# Altium PCB WUT-YJ-4-3-1.PcbDoc (part 4 of 11)
Units mm, origin at the board's own origin, x right, y up, seen from the top; angles counter-clockwise.
Board outline 85 x 56 mm, 4 copper layers (Top Layer, GND_Plane, 3V3_Plane, Bottom Layer); 182 components, 321 nets, 1106 pads, 360 vias.
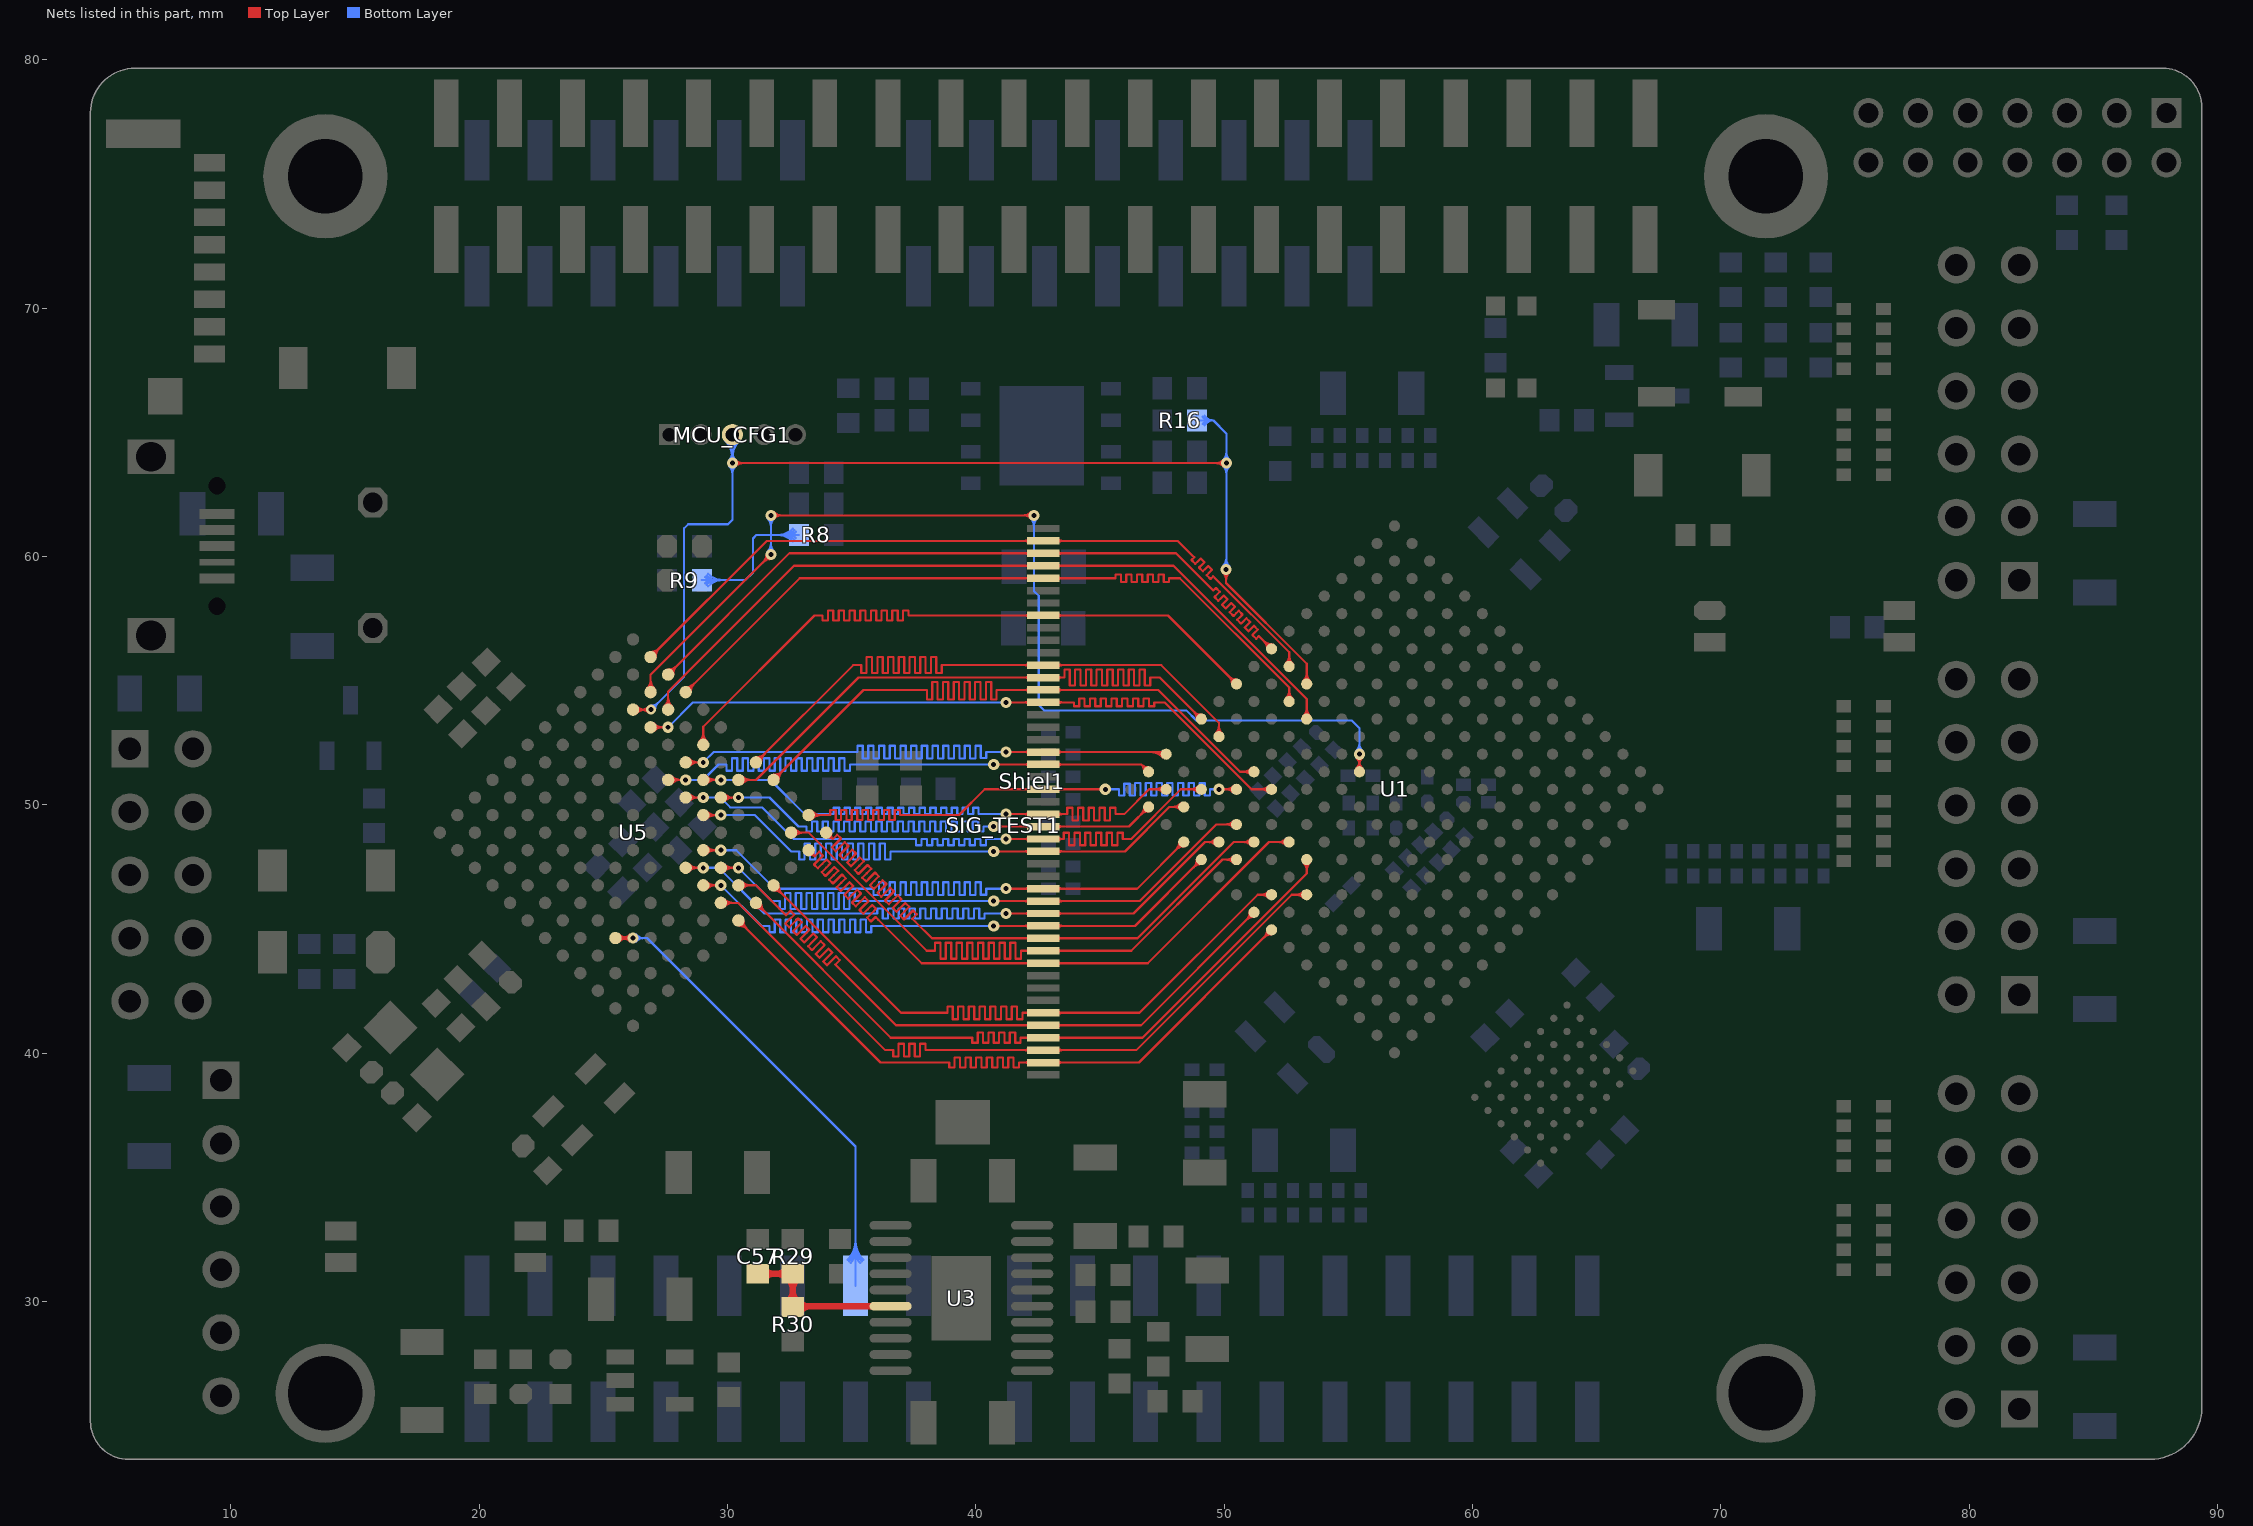
[diagram p6: the nets of this part, all layers, seen from the top]

## Via types
v1: diameter 0.45, hole 0.2, Top Layer to Bottom Layer, tented both sides, 280 vias
v2: diameter 0.61, hole 0.33, Top Layer to Bottom Layer, tented both sides, 40 vias
v3: diameter 0.403, hole 0.2, Top Layer to Bottom Layer, tented both sides, 15 vias
v4: diameter 0.5, hole 0.2, Top Layer to Bottom Layer, tented both sides, 12 vias
v5: diameter 0.864, hole 0.508, Top Layer to Bottom Layer, tented both sides, 11 vias
v6: diameter 0.864, hole 0.381, Top Layer to Bottom Layer, tented both sides, 1 vias
v7: diameter 0.864, hole 0.356, Top Layer to Bottom Layer, tented both sides, 1 vias

## Nets (pads, with @x,y where several pads share a name; then routed paths per layer and width w, separated by ;. In a path a pad name is that pad's centre, name@x,y a point inside that pad or via, vN(x,y) a via of type N, cw(c..) or ccw(c..) an arc to the next point about the centre after c; other vN are vias at no path point) (continued)
CAN0_TX: Shiel1.42 U5.K9 | length 26.8
  Top Layer w0.089: U5.K9@25.492,44.644 v1(26.199,44.644) ; U5.K9@25.575,44.562 cw(c25.774,44.363) 25.774,44.644 cw(c25.774,44.926) U5.K9@25.575,44.727 ; U5.K9@25.637,44.499 cw(c25.988,44.148) 25.988,44.644 cw(c25.988,45.14) U5.K9@25.637,44.79 ; 25.832,44.602 cw(c25.889,44.388) v1@26.06,44.529 ; 25.832,44.686 ccw(c25.889,44.901) v1@26.06,44.759 ; 25.891,44.618 ccw(c25.827,44.859) v1@26.043,44.734 ; 25.891,44.67 cw(c25.827,44.429) v1@26.043,44.554 ; 25.965,44.638 cw(c26.006,44.485) v1@26.129,44.586 ; 25.965,44.65 ccw(c26.006,44.804) v1@26.129,44.703 ; v1@26.072,44.517 ccw(c25.763,44.208) 25.763,44.644 ccw(c25.763,45.08) v1@26.072,44.772
  Bottom Layer w0.089: v1(26.199,44.644) 26.76,44.644 35.154,36.25 Shiel1.42@35.154,30.645 ; v1@26.327,44.517 cw(c26.635,44.208) 26.635,44.644 cw(c26.635,45.08) v1@26.327,44.772 ; Shiel1.42@34.831,31.682 ccw(c34.054,32.46) 35.154,32.46 ccw(c36.253,32.46) Shiel1.42@35.476,31.682 ; Shiel1.42@34.894,31.619 ccw(c34.268,32.245) 35.154,32.245 ccw(c36.039,32.245) Shiel1.42@35.413,31.619 ; Shiel1.42@34.957,31.556 ccw(c34.483,32.031) 35.154,32.031 ccw(c35.824,32.031) Shiel1.42@35.35,31.556
CLK_OUT: SIG_TEST1.22 U1.D13 U5.A11 | length 34.2
  Top Layer w0.089: U5.A11@33.27,49.594 34.036,49.594 34.144,49.594 34.144,49.797 34.36,49.797 34.36,49.594 34.36,49.391 34.576,49.391 34.576,49.594 34.576,49.797 34.792,49.797 34.792,49.594 34.792,49.391 35.008,49.391 35.008,49.594 35.008,49.797 35.223,49.797 35.223,49.594 35.223,49.391 35.439,49.391 35.439,49.594 35.439,49.797 35.655,49.797 35.655,49.594 35.655,49.391 35.871,49.391 35.871,49.594 35.871,49.797 36.087,49.797 36.087,49.594 36.087,49.391 36.303,49.391 36.303,49.594 36.303,49.797 36.519,49.797 36.519,49.594 36.519,49.391 36.735,49.391 36.735,49.594 36.735,49.797 36.951,49.797 36.951,49.594 36.982,49.594 39.32,49.594 40.357,50.631 SIG_TEST1.22@42.713,50.631 ; U5.A11@33.353,49.511 cw(c33.552,49.312) 33.552,49.594 cw(c33.552,49.876) U5.A11@33.353,49.676 ; U5.A11@33.416,49.449 cw(c33.767,49.098) 33.767,49.594 cw(c33.767,50.09) U5.A11@33.416,49.739 ; SIG_TEST1.22@42.147,50.557 ccw(c41.967,50.377) 41.967,50.631 ccw(c41.967,50.886) SIG_TEST1.22@42.147,50.706 ; SIG_TEST1.22@42.721,50.631 v1(45.213,50.631) ; SIG_TEST1.22@43.296,50.557 cw(c43.476,50.377) 43.476,50.631 cw(c43.476,50.886) SIG_TEST1.22@43.296,50.706 ; v1(49.787,50.63) U1.D13@50.494,50.63 ; U1.D13@50.367,50.503 ccw(c50.058,50.195) 50.058,50.63 ccw(c50.058,51.066) U1.D13@50.367,50.758
  Bottom Layer w0.089: v1(45.213,50.631) 45.542,50.631 45.549,50.631 45.764,50.631 45.764,50.377 45.98,50.377 45.98,50.631 45.98,50.857 46.196,50.857 46.196,50.631 46.196,50.377 46.412,50.377 46.412,50.631 46.412,50.885 46.628,50.885 46.628,50.631 46.628,50.377 46.844,50.377 46.844,50.631 46.844,50.885 47.06,50.885 47.06,50.631 47.06,50.377 47.276,50.377 47.276,50.631 47.276,50.885 47.492,50.885 47.492,50.631 47.492,50.377 47.708,50.377 47.708,50.631 47.708,50.885 47.923,50.885 47.923,50.631 47.923,50.377 48.139,50.377 48.139,50.631 48.139,50.885 48.355,50.885 48.355,50.631 48.355,50.377 48.571,50.377 48.571,50.631 48.571,50.885 48.787,50.885 48.787,50.631 48.787,50.377 49.003,50.377 49.003,50.631 49.003,50.885 49.219,50.885 49.219,50.631 49.219,50.377 49.435,50.377 49.435,50.631 49.543,50.631 v1(49.787,50.63)
DIN: MCU_CFG1.3 R16.2 U1.J14 U5.C3 | length 61.5
  Top Layer w0.089: U5.C3@26.199,53.837 v3(26.93,53.837) ; U5.C3@26.282,53.754 cw(c26.481,53.555) 26.481,53.837 cw(c26.481,54.118) U5.C3@26.282,53.919 ; U5.C3@26.345,53.691 cw(c26.695,53.34) 26.695,53.837 cw(c26.695,54.333) U5.C3@26.345,53.982 ; v3@26.819,53.726 ccw(c26.551,53.457) 26.551,53.837 ccw(c26.551,54.216) v3@26.819,53.948 ; v1(30.201,63.767) v1(50.089,63.767) ; v1@30.328,63.639 cw(c30.636,63.331) 30.636,63.767 cw(c30.636,64.203) v1@30.328,63.894 ; v1@49.948,59.359 cw(c49.64,59.051) 50.076,59.051 cw(c50.512,59.051) v1@50.204,59.359 ; v1@49.961,63.639 ccw(c49.653,63.331) 49.653,63.767 ccw(c49.653,64.203) v1@49.961,63.894 ; v1@50.089,59.499 v1(50.076,59.487) 50.076,58.938 53.323,55.691 U1.J14@53.323,54.873 ; U1.J14@53.195,55.001 ccw(c52.887,55.309) 53.323,55.309 ccw(c53.759,55.309) U1.J14@53.45,55.001
  Bottom Layer w0.089: v3(26.93,53.837) 28.258,55.164 28.258,61.138 28.42,61.3 30.02,61.3 30.201,61.481 v1(30.201,63.767) MCU_CFG1.3@30.201,64.91 ; v3@26.93,53.994 ccw(c26.93,54.373) 27.198,54.105 ccw(c27.466,53.837) v3@27.087,53.837 ; MCU_CFG1.3@29.932,64.641 cw(c29.282,63.991) 30.201,63.991 cw(c31.119,63.991) MCU_CFG1.3@30.47,64.641 ; MCU_CFG1.3@29.994,64.703 cw(c29.496,64.206) 30.201,64.206 cw(c30.905,64.206) MCU_CFG1.3@30.407,64.703 ; MCU_CFG1.3@30.057,64.766 cw(c29.711,64.42) 30.201,64.42 cw(c30.69,64.42) MCU_CFG1.3@30.344,64.766 ; v1@30.073,63.639 cw(c29.765,63.331) 30.201,63.331 cw(c30.636,63.331) v1@30.328,63.639 ; v1@30.073,63.894 ccw(c29.765,64.203) 30.201,64.203 ccw(c30.636,64.203) v1@30.328,63.894 ; v1@30.085,63.905 ccw(c29.914,64.109) 30.177,64.148 ; v1@30.093,63.912 ccw(c29.899,64.172) 30.22,64.125 ; 30.181,64.125 ccw(c30.502,64.172) v1@30.308,63.912 ; 30.224,64.148 ccw(c30.487,64.109) v1@30.316,63.905 ; R16.2@48.909,65.481 49.568,65.481 ; R16.2@49.132,65.335 cw(c49.403,65.157) 49.403,65.481 cw(c49.403,65.806) R16.2@49.132,65.628 ; R16.2@49.206,65.286 cw(c49.568,65.048) 49.568,65.481 ; R16.2@49.206,65.676 ccw(c49.568,65.914) 49.568,65.481 ; v1@49.948,59.614 ccw(c49.61,59.953) 50.089,59.953 ; v1@49.961,63.639 cw(c49.653,63.331) 50.089,63.331 cw(c50.525,63.331) v1@50.216,63.639 ; v1@49.961,63.894 ccw(c49.653,64.203) 50.089,64.203 ccw(c50.525,64.203) v1@50.216,63.894 ; v1@50.011,59.552 ccw(c49.824,59.739) 50.089,59.739 ; v1(50.076,59.487) 50.089,59.499 50.089,64.96 49.568,65.481 ; 50.089,59.892 ccw(c50.481,59.892) v1@50.204,59.614
DONE: R8.1 R9.2 U1.H10 U5.B3 | length 61.4
  Top Layer w0.089: U5.B3@26.761,54.689 ccw(c26.41,55.04) 26.906,55.04 ccw(c27.403,55.04) U5.B3@27.052,54.689 ; U5.B3@26.824,54.626 ccw(c26.625,54.825) 26.906,54.825 ccw(c27.188,54.825) U5.B3@26.989,54.626 ; U5.B3@26.906,54.544 26.906,55.24 v1(31.75,60.084) ; v1@31.569,60.084 cw(c31.134,60.084) 31.442,59.775 cw(c31.75,59.467) v1@31.75,59.903 ; v1(31.75,61.658) v1(42.342,61.658) ; v1@31.878,61.531 cw(c32.186,61.223) 32.186,61.658 cw(c32.186,62.094) v1@31.878,61.786 ; v1@42.214,61.531 ccw(c41.906,61.223) 41.906,61.658 ccw(c41.906,62.094) v1@42.214,61.786 ; U1.H10@55.316,51.465 ccw(c55.008,51.773) 55.444,51.773 ccw(c55.88,51.773) U1.H10@55.572,51.465 ; v1@55.316,51.917 cw(c55.008,51.609) 55.444,51.609 cw(c55.88,51.609) v1@55.572,51.917 ; U1.H10@55.444,51.337 v1(55.444,52.045)
  Bottom Layer w0.089: R9.2@28.97,59.055 30.721,59.055 31.026,59.36 31.026,60.731 31.166,60.871 31.75,60.871 ; R9.2@29.096,58.929 cw(c29.399,58.626) 29.399,59.055 cw(c29.399,59.484) R9.2@29.096,59.181 ; R9.2@29.159,58.866 cw(c29.614,58.411) 29.614,59.055 cw(c29.614,59.699) R9.2@29.159,59.244 ; R9.2@29.222,58.804 cw(c29.829,58.197) 29.829,59.055 cw(c29.829,59.913) R9.2@29.222,59.306 ; v1@31.622,60.211 ccw(c31.314,60.52) 31.75,60.52 ccw(c32.186,60.52) v1@31.878,60.211 ; v1@31.622,61.531 cw(c31.314,61.223) 31.75,61.223 cw(c32.186,61.223) v1@31.878,61.531 ; v1(31.75,60.084) 31.75,60.871 ; v1(31.75,61.658) 31.75,60.871 ; R8.1@32.627,60.62 ccw(c32.02,60.013) 32.02,60.871 ccw(c32.02,61.729) R8.1@32.627,61.123 ; R8.1@32.69,60.683 ccw(c32.235,60.227) 32.235,60.871 ccw(c32.235,61.515) R8.1@32.69,61.06 ; R8.1@32.753,60.745 ccw(c32.45,60.442) 32.45,60.871 ccw(c32.45,61.3) R8.1@32.753,60.997 ; R8.1@32.879,60.871 31.75,60.871 ; v1@42.214,61.531 cw(c41.906,61.223) 42.342,61.223 cw(c42.778,61.223) v1@42.469,61.531 ; v1(42.342,61.658) 42.342,58.61 42.532,58.42 42.532,54.026 42.748,53.81 48.478,53.81 48.885,53.404 55.131,53.404 55.444,53.09 v1(55.444,52.045) ; v1@55.316,52.172 ccw(c55.008,52.48) 55.444,52.48 ccw(c55.88,52.48) v1@55.572,52.172
EN: C57.2 R29.2 R30.1 U3.6 | length 11.9
  Top Layer w0.254: C57.2@31.217,31.126 R29.2@32.635,31.126 R30.1@32.635,29.796 32.664,29.825 U3.6@36.571,29.825 ; C57.2@31.46,30.933 cw(c31.926,30.467) 31.926,31.126 cw(c31.926,31.785) C57.2@31.46,31.319 ; R29.2@32.392,30.933 ccw(c31.926,30.467) 31.926,31.126 ccw(c31.926,31.785) R29.2@32.392,31.319 ; R30.1@32.442,29.989 ccw(c31.976,30.455) 32.635,30.455 ccw(c33.294,30.455) R30.1@32.828,29.989 ; R29.2@32.442,30.933 cw(c31.976,30.467) 32.635,30.467 cw(c33.294,30.467) R29.2@32.828,30.933 ; R30.1@32.878,29.603 cw(c33.414,29.066) 33.414,29.825 ; R30.1@32.878,29.989 ccw(c33.274,30.385) 33.274,29.825
FB_AD0: SIG_TEST1.2 U1.J15 U5.A2 | length 34.3
  Top Layer w0.089: U5.A2@26.906,55.958 31.58,60.631 SIG_TEST1.2@42.721,60.631 48.131,60.631 48.736,60.027 48.792,59.971 48.684,59.863 48.837,59.71 48.945,59.818 49.052,59.926 49.205,59.773 49.097,59.666 48.99,59.558 49.142,59.405 49.25,59.513 49.358,59.621 49.51,59.468 49.403,59.36 49.295,59.252 49.448,59.1 49.555,59.208 49.632,59.131 52.616,56.147 U1.J15@52.616,55.58 ; U5.A2@26.906,56.075 ccw(c26.906,56.356) 27.106,56.157 ccw(c27.305,55.958) U5.A2@27.023,55.958 ; U5.A2@26.906,56.163 ccw(c26.906,56.66) 27.257,56.309 ccw(c27.608,55.958) U5.A2@27.112,55.958 ; SIG_TEST1.2@42.147,60.557 ccw(c41.967,60.377) 41.967,60.631 ccw(c41.967,60.886) SIG_TEST1.2@42.147,60.706 ; SIG_TEST1.2@43.296,60.557 cw(c43.476,60.377) 43.476,60.631 cw(c43.476,60.886) SIG_TEST1.2@43.296,60.706 ; U1.J15@52.488,55.708 ccw(c52.18,56.016) 52.616,56.016 ccw(c53.052,56.016) U1.J15@52.743,55.708
FB_AD1: SIG_TEST1.3 U1.J16 U5.A3 | length 34.3
  Top Layer w0.089: U5.A3@27.613,55.251 32.494,60.131 SIG_TEST1.3@42.721,60.131 48.064,60.131 49.488,58.708 49.564,58.632 49.672,58.739 49.825,58.587 49.717,58.479 49.609,58.371 49.762,58.219 49.869,58.326 49.977,58.434 50.13,58.281 50.022,58.174 49.914,58.066 50.067,57.913 50.175,58.021 50.283,58.129 50.435,57.976 50.327,57.868 50.22,57.761 50.372,57.608 50.48,57.716 50.588,57.823 50.741,57.671 50.633,57.563 50.525,57.455 50.678,57.303 50.785,57.41 50.893,57.518 51.046,57.365 50.938,57.258 50.83,57.15 50.983,56.997 51.091,57.105 51.199,57.213 51.351,57.06 51.243,56.952 51.136,56.845 51.288,56.692 51.396,56.8 51.526,56.67 U1.J16@51.909,56.287 ; U5.A3@27.613,55.367 ccw(c27.613,55.649) 27.813,55.45 ccw(c28.012,55.251) U5.A3@27.73,55.251 ; U5.A3@27.613,55.456 ccw(c27.613,55.953) 27.964,55.602 ccw(c28.315,55.251) U5.A3@27.819,55.251 ; SIG_TEST1.3@42.147,60.057 ccw(c41.967,59.877) 41.967,60.131 ccw(c41.967,60.386) SIG_TEST1.3@42.147,60.206 ; SIG_TEST1.3@43.296,60.057 cw(c43.476,59.877) 43.476,60.131 cw(c43.476,60.386) SIG_TEST1.3@43.296,60.206 ; U1.J16@51.728,56.287 ccw(c51.292,56.287) 51.6,56.595 ccw(c51.909,56.904) U1.J16@51.909,56.468
FB_AD2: SIG_TEST1.5 U1.H14 U5.A4 | length 34.3
  Top Layer w0.089: U5.A4@28.321,54.544 32.908,59.131 SIG_TEST1.5@42.721,59.131 45.542,59.131 45.625,59.131 45.625,59.284 45.841,59.284 45.841,59.131 45.841,58.979 46.057,58.979 46.057,59.131 46.057,59.284 46.272,59.284 46.272,59.131 46.272,58.979 46.488,58.979 46.488,59.131 46.488,59.284 46.704,59.284 46.704,59.131 46.704,58.979 46.92,58.979 46.92,59.131 46.92,59.284 47.136,59.284 47.136,59.131 47.136,58.979 47.352,58.979 47.352,59.131 47.352,59.284 47.568,59.284 47.568,59.131 47.568,58.979 47.784,58.979 47.784,59.131 47.892,59.131 48.211,59.131 52.616,54.727 U1.H14@52.616,54.166 ; U5.A4@28.321,54.66 ccw(c28.321,54.942) 28.52,54.743 ccw(c28.719,54.544) U5.A4@28.437,54.544 ; U5.A4@28.321,54.749 ccw(c28.321,55.245) 28.671,54.895 ccw(c29.022,54.544) U5.A4@28.526,54.544 ; SIG_TEST1.5@42.147,59.057 ccw(c41.967,58.877) 41.967,59.131 ccw(c41.967,59.386) SIG_TEST1.5@42.147,59.206 ; SIG_TEST1.5@43.296,59.057 cw(c43.476,58.877) 43.476,59.131 cw(c43.476,59.386) SIG_TEST1.5@43.296,59.206 ; U1.H14@52.488,54.294 ccw(c52.18,54.602) 52.616,54.602 ccw(c53.052,54.602) U1.H14@52.743,54.294
FB_AD3: SIG_TEST1.4 U1.H13 U5.B4 | length 34.3
  Top Layer w0.089: U5.B4@27.468,53.982 ccw(c27.117,54.333) 27.613,54.333 ccw(c28.11,54.333) U5.B4@27.759,53.982 ; U5.B4@27.531,53.919 ccw(c27.332,54.118) 27.613,54.118 ccw(c27.895,54.118) U5.B4@27.696,53.919 ; U5.B4@27.613,53.837 27.613,54.568 32.677,59.631 SIG_TEST1.4@42.721,59.631 47.962,59.631 53.323,54.271 U1.H13@53.323,53.459 ; SIG_TEST1.4@42.147,59.557 ccw(c41.967,59.377) 41.967,59.631 ccw(c41.967,59.886) SIG_TEST1.4@42.147,59.706 ; SIG_TEST1.4@43.296,59.557 cw(c43.476,59.377) 43.476,59.631 cw(c43.476,59.886) SIG_TEST1.4@43.296,59.706 ; U1.H13@53.195,53.586 ccw(c52.887,53.895) 53.323,53.895 ccw(c53.759,53.895) U1.H13@53.45,53.586
FB_AD4: SIG_TEST1.15 U1.E12 U5.C4 | length 34.2
  Top Layer w0.089: U5.C4@26.906,53.129 v1(27.613,53.129) ; U5.C4@26.989,53.047 cw(c27.188,52.848) 27.188,53.129 cw(c27.188,53.411) U5.C4@26.989,53.212 ; U5.C4@27.052,52.984 cw(c27.403,52.633) 27.403,53.129 cw(c27.403,53.626) U5.C4@27.052,53.275 ; v1(41.221,54.131) 43.777,54.131 43.948,54.131 43.948,53.979 44.164,53.979 44.164,54.131 44.164,54.284 44.38,54.284 44.38,54.131 44.38,53.979 44.596,53.979 44.596,54.131 44.596,54.284 44.812,54.284 44.812,54.131 44.812,53.979 45.028,53.979 45.028,54.131 45.028,54.284 45.244,54.284 45.244,54.131 45.244,53.979 45.46,53.979 45.46,54.131 45.46,54.284 45.676,54.284 45.676,54.131 45.676,53.979 45.891,53.979 45.891,54.131 45.891,54.284 46.107,54.284 46.107,54.131 46.107,53.979 46.323,53.979 46.323,54.131 46.323,54.284 46.539,54.284 46.539,54.131 46.539,53.979 46.755,53.979 46.755,54.131 46.755,54.284 46.971,54.284 46.971,54.131 46.971,53.979 47.187,53.979 47.187,54.131 47.295,54.131 47.595,54.131 51.096,50.63 U1.E12@51.909,50.63 ; SIG_TEST1.15@42.147,54.057 ccw(c41.967,53.877) 41.967,54.131 ccw(c41.967,54.386) SIG_TEST1.15@42.147,54.206 ; SIG_TEST1.15@43.296,54.057 cw(c43.476,53.877) 43.476,54.131 cw(c43.476,54.386) SIG_TEST1.15@43.296,54.206 ; U1.E12@51.781,50.503 ccw(c51.473,50.195) 51.473,50.63 ccw(c51.473,51.066) U1.E12@51.781,50.758
  Bottom Layer w0.089: v1(27.613,53.129) 28.615,54.131 v1(41.221,54.131) v1@41.194,54.158
FB_AD5: SIG_TEST1.24 U1.B15 U5.C7 | length 34
  Top Layer w0.089: U5.C7@29.028,51.008 v1(29.735,51.008) ; U5.C7@29.11,50.926 cw(c29.309,50.727) 29.309,51.008 cw(c29.309,51.29) U5.C7@29.11,51.091 ; U5.C7@29.173,50.863 cw(c29.524,50.512) 29.524,51.008 cw(c29.524,51.504) U5.C7@29.173,51.153 ; v1(41.221,49.631) SIG_TEST1.24@42.721,49.631 43.561,49.631 43.682,49.631 43.682,49.885 43.898,49.885 43.898,49.631 43.898,49.377 44.113,49.377 44.113,49.631 44.113,49.885 44.329,49.885 44.329,49.631 44.329,49.377 44.545,49.377 44.545,49.631 44.545,49.885 44.761,49.885 44.761,49.631 44.761,49.377 44.977,49.377 44.977,49.631 44.977,49.885 45.193,49.885 45.193,49.631 45.193,49.377 45.409,49.377 45.409,49.631 45.409,49.885 45.625,49.885 45.625,49.631 45.841,49.631 45.949,49.631 45.974,49.631 46.973,50.63 U1.B15@47.666,50.63 ; SIG_TEST1.24@42.147,49.557 ccw(c41.967,49.377) 41.967,49.631 ccw(c41.967,49.886) SIG_TEST1.24@42.147,49.706 ; SIG_TEST1.24@43.296,49.557 cw(c43.476,49.377) 43.476,49.631 cw(c43.476,49.886) SIG_TEST1.24@43.296,49.706 ; U1.B15@47.538,50.503 ccw(c47.23,50.195) 47.23,50.63 ccw(c47.23,51.066) U1.B15@47.538,50.758
  Bottom Layer w0.089: v1(29.735,51.008) 31.736,51.008 33.113,49.631 33.922,49.631 34.068,49.631 34.284,49.631 34.284,49.885 34.5,49.885 34.5,49.631 34.715,49.631 34.715,49.885 34.931,49.885 34.931,49.631 35.147,49.631 35.147,49.885 35.363,49.885 35.363,49.631 35.579,49.631 35.579,49.885 35.795,49.885 35.795,49.631 36.011,49.631 36.011,49.885 36.227,49.885 36.227,49.631 36.443,49.631 36.443,49.885 36.659,49.885 36.659,49.631 36.874,49.631 36.874,49.885 37.09,49.885 37.09,49.631 37.306,49.631 37.306,49.885 37.522,49.885 37.522,49.631 37.738,49.631 37.738,49.885 37.954,49.885 37.954,49.631 38.17,49.631 38.17,49.885 38.386,49.885 38.386,49.631 38.602,49.631 38.602,49.885 38.818,49.885 38.818,49.631 39.033,49.631 39.033,49.885 39.249,49.885 39.249,49.631 39.465,49.631 39.465,49.885 39.681,49.885 39.681,49.631 39.897,49.631 39.897,49.885 40.113,49.885 40.113,49.631 40.329,49.631 40.437,49.631 v1(41.221,49.631)
FB_AD6: SIG_TEST1.26 U1.C14 U5.D7 | length 34.1
  Top Layer w0.089: U5.D7@28.321,50.301 v1(29.028,50.301) ; U5.D7@28.403,50.219 cw(c28.602,50.019) 28.602,50.301 cw(c28.602,50.583) U5.D7@28.403,50.384 ; U5.D7@28.466,50.156 cw(c28.817,49.805) 28.817,50.301 cw(c28.817,50.797) U5.D7@28.466,50.446 ; v1(41.221,48.631) SIG_TEST1.26@42.721,48.631 43.497,48.631 43.542,48.631 43.542,48.885 43.758,48.885 43.758,48.631 43.758,48.377 43.974,48.377 43.974,48.631 43.974,48.885 44.19,48.885 44.19,48.631 44.19,48.377 44.406,48.377 44.406,48.631 44.406,48.885 44.621,48.885 44.621,48.631 44.621,48.377 44.837,48.377 44.837,48.631 44.837,48.885 45.053,48.885 45.053,48.631 45.053,48.377 45.269,48.377 45.269,48.631 45.269,48.885 45.485,48.885 45.485,48.631 45.485,48.377 45.701,48.377 45.701,48.631 45.701,48.885 45.917,48.885 45.917,48.631 46.133,48.631 46.241,48.631 46.255,48.631 48.254,50.63 U1.C14@49.08,50.63 ; SIG_TEST1.26@42.147,48.557 ccw(c41.967,48.377) 41.967,48.631 ccw(c41.967,48.886) SIG_TEST1.26@42.147,48.706 ; SIG_TEST1.26@43.296,48.557 cw(c43.476,48.377) 43.476,48.631 cw(c43.476,48.886) SIG_TEST1.26@43.296,48.706 ; U1.C14@48.952,50.503 ccw(c48.644,50.195) 48.644,50.63 ccw(c48.644,51.066) U1.C14@48.952,50.758
  Bottom Layer w0.089: v1(29.028,50.301) 29.713,50.301 30.109,49.905 31.392,49.905 32.665,48.631 37.529,48.631 37.598,48.631 37.598,48.377 37.814,48.377 37.814,48.631 38.03,48.631 38.03,48.377 38.246,48.377 38.246,48.631 38.462,48.631 38.462,48.377 38.678,48.377 38.678,48.631 38.894,48.631 38.894,48.377 39.11,48.377 39.11,48.631 39.326,48.631 39.326,48.377 39.541,48.377 39.541,48.631 39.757,48.631 39.757,48.377 39.973,48.377 39.973,48.631 40.189,48.631 40.189,48.377 40.405,48.377 40.405,48.631 40.621,48.631 40.837,48.631 40.945,48.631 v1(41.221,48.631)
FB_AD7: SIG_TEST1.12 U1.E15 U5.A8 | length 34.2
  Top Layer w0.089: U5.A8@31.149,51.715 35.065,55.631 35.389,55.631 35.389,55.309 35.605,55.309 35.605,55.954 35.821,55.954 35.821,55.309 36.037,55.309 36.037,55.954 36.253,55.954 36.253,55.309 36.469,55.309 36.469,55.954 36.684,55.954 36.684,55.309 36.9,55.309 36.9,55.954 37.116,55.954 37.116,55.309 37.332,55.309 37.332,55.954 37.548,55.954 37.548,55.309 37.764,55.309 37.764,55.954 37.98,55.954 37.98,55.309 38.196,55.309 38.196,55.954 38.412,55.954 38.412,55.309 38.628,55.309 38.628,55.631 SIG_TEST1.12@42.721,55.631 47.468,55.631 49.787,53.312 U1.E15@49.787,52.752 ; U5.A8@31.149,51.832 ccw(c31.149,52.113) 31.348,51.914 ccw(c31.547,51.715) U5.A8@31.266,51.715 ; U5.A8@31.149,51.921 ccw(c31.149,52.417) 31.5,52.066 ccw(c31.851,51.715) U5.A8@31.355,51.715 ; SIG_TEST1.12@42.147,55.557 ccw(c41.967,55.377) 41.967,55.631 ccw(c41.967,55.886) SIG_TEST1.12@42.147,55.706 ; SIG_TEST1.12@43.296,55.557 cw(c43.476,55.377) 43.476,55.631 cw(c43.476,55.886) SIG_TEST1.12@43.296,55.706 ; U1.E15@49.66,52.879 ccw(c49.351,53.188) 49.787,53.188 ccw(c50.223,53.188) U1.E15@49.915,52.879
FB_AD8: SIG_TEST1.13 U1.E16 U5.B8 | length 34
  Top Layer w0.089: U5.B8@30.442,51.008 31.153,51.008 35.276,55.131 SIG_TEST1.13@42.721,55.131 43.459,55.131 ; U5.B8@30.524,50.926 cw(c30.724,50.727) 30.724,51.008 cw(c30.724,51.29) U5.B8@30.524,51.091 ; U5.B8@30.587,50.863 cw(c30.938,50.512) 30.938,51.008 cw(c30.938,51.504) U5.B8@30.587,51.153 ; SIG_TEST1.13@42.147,55.057 ccw(c41.967,54.877) 41.967,55.131 ccw(c41.967,55.386) SIG_TEST1.13@42.147,55.206 ; SIG_TEST1.13@43.3,55.061 cw(c43.459,54.916) 43.459,55.131 ; SIG_TEST1.13@43.3,55.202 ccw(c43.459,55.347) 43.459,55.131 ; U1.E16@48.9,53.459 ccw(c48.464,53.459) 48.772,53.767 ccw(c49.08,54.075) U1.E16@49.08,53.639 ; U1.E16@49.08,53.459 47.408,55.131 47.346,55.131 47.238,55.131 47.022,55.131 47.022,54.809 46.806,54.809 46.806,55.131 46.806,55.454 46.59,55.454 46.59,55.131 46.59,54.809 46.374,54.809 46.374,55.131 46.374,55.454 46.158,55.454 46.158,55.131 46.158,54.809 45.942,54.809 45.942,55.131 45.942,55.454 45.726,55.454 45.726,55.131 45.726,54.809 45.51,54.809 45.51,55.131 45.51,55.454 45.295,55.454 45.295,55.131 45.295,54.809 45.079,54.809 45.079,55.131 45.079,55.454 44.863,55.454 44.863,55.131 44.863,54.809 44.647,54.809 44.647,55.131 44.647,55.454 44.431,55.454 44.431,55.131 44.431,54.809 44.215,54.809 44.215,55.131 44.215,55.454 43.999,55.454 43.999,55.131 43.999,54.809 43.783,54.809 43.783,55.131 43.783,55.454 43.567,55.454 43.567,55.131 43.459,55.131
FB_AD9: SIG_TEST1.25 U1.A15 U5.C8 | length 34.2
  Top Layer w0.089: U5.C8@29.735,50.301 v1(30.442,50.301) ; U5.C8@29.817,50.219 cw(c30.016,50.019) 30.016,50.301 cw(c30.016,50.583) U5.C8@29.817,50.384 ; U5.C8@29.88,50.156 cw(c30.231,49.805) 30.231,50.301 cw(c30.231,50.797) U5.C8@29.88,50.446 ; v1(40.721,49.131) SIG_TEST1.25@42.721,49.131 46.167,49.131 U1.A15@46.959,49.923 ; SIG_TEST1.25@42.147,49.057 ccw(c41.967,48.877) 41.967,49.131 ccw(c41.967,49.386) SIG_TEST1.25@42.147,49.206 ; SIG_TEST1.25@43.296,49.057 cw(c43.476,48.877) 43.476,49.131 cw(c43.476,49.386) SIG_TEST1.25@43.296,49.206 ; U1.A15@46.778,49.923 cw(c46.342,49.923) 46.651,49.615 cw(c46.959,49.307) U1.A15@46.959,49.743
  Bottom Layer w0.089: v1(30.442,50.301) 31.694,50.301 32.863,49.131 32.971,49.131 33.187,49.131 33.187,48.928 33.403,48.928 33.403,49.131 33.403,49.335 33.619,49.335 33.619,49.131 33.619,48.928 33.835,48.928 33.835,49.131 33.835,49.335 34.051,49.335 34.051,49.131 34.051,48.928 34.267,48.928 34.267,49.131 34.267,49.335 34.483,49.335 34.483,49.131 34.483,48.928 34.699,48.928 34.699,49.131 34.699,49.335 34.914,49.335 34.914,49.131 34.914,48.928 35.13,48.928 35.13,49.131 35.13,49.335 35.346,49.335 35.346,49.131 35.346,48.928 35.562,48.928 35.562,49.131 35.562,49.335 35.778,49.335 35.778,49.131 35.778,48.928 35.994,48.928 35.994,49.131 35.994,49.335 36.21,49.335 36.21,49.131 36.21,48.928 36.426,48.928 36.426,49.131 36.426,49.335 36.642,49.335 36.642,49.131 36.642,48.928 36.858,48.928 36.858,49.131 36.858,49.335 37.073,49.335 37.073,49.131 37.073,48.928 37.289,48.928 37.289,49.131 37.289,49.335 37.505,49.335 37.505,49.131 37.505,48.928 37.721,48.928 37.721,49.131 37.721,49.335 37.937,49.335 37.937,49.131 37.937,48.928 38.153,48.928 38.153,49.131 38.153,49.335 38.369,49.335 38.369,49.131 38.369,48.928 38.585,48.928 38.585,49.131 38.585,49.335 38.801,49.335 38.801,49.131 38.801,48.928 39.017,48.928 39.017,49.131 39.017,49.335 39.232,49.335 39.232,49.131 39.232,48.928 39.448,48.928 39.448,49.131 39.448,49.335 39.664,49.335 39.664,49.131 39.664,48.928 39.88,48.928 39.88,49.131 39.88,49.335 40.096,49.335 40.096,49.131 40.096,48.928 40.312,48.928 40.312,49.131 40.411,49.131 v1(40.721,49.131)
FB_AD10: SIG_TEST1.27 U1.B14 U5.D8 | length 34.4
  Top Layer w0.089: U5.D8@29.028,49.594 v1(29.735,49.594) ; U5.D8@29.11,49.511 cw(c29.309,49.312) 29.309,49.594 cw(c29.309,49.876) U5.D8@29.11,49.676 ; U5.D8@29.173,49.449 cw(c29.524,49.098) 29.524,49.594 cw(c29.524,50.09) U5.D8@29.173,49.739 ; v1(40.721,48.131) SIG_TEST1.27@42.721,48.131 46.007,48.131 47.799,49.923 U1.B14@48.373,49.923 ; SIG_TEST1.27@42.147,48.057 ccw(c41.967,47.877) 41.967,48.131 ccw(c41.967,48.386) SIG_TEST1.27@42.147,48.206 ; SIG_TEST1.27@43.296,48.057 cw(c43.476,47.877) 43.476,48.131 cw(c43.476,48.386) SIG_TEST1.27@43.296,48.206 ; U1.B14@48.245,49.796 ccw(c47.937,49.487) 47.937,49.923 ccw(c47.937,50.359) U1.B14@48.245,50.051
  Bottom Layer w0.089: v1(29.735,49.594) 31.106,49.594 32.568,48.131 32.676,48.131 32.892,48.131 32.892,47.809 33.108,47.809 33.108,48.131 33.108,48.454 33.324,48.454 33.324,48.131 33.324,47.809 33.54,47.809 33.54,48.131 33.54,48.454 33.755,48.454 33.755,48.131 33.755,47.809 33.971,47.809 33.971,48.131 33.971,48.454 34.187,48.454 34.187,48.131 34.187,47.809 34.403,47.809 34.403,48.131 34.403,48.454 34.619,48.454 34.619,48.131 34.619,47.809 34.835,47.809 34.835,48.131 34.835,48.454 35.051,48.454 35.051,48.131 35.051,47.809 35.267,47.809 35.267,48.131 35.267,48.454 35.483,48.454 35.483,48.131 35.483,47.809 35.699,47.809 35.699,48.131 35.699,48.454 35.914,48.454 35.914,48.131 35.914,47.809 36.13,47.809 36.13,48.131 36.13,48.454 36.346,48.454 36.346,48.131 36.346,47.809 36.562,47.809 36.562,48.131 36.627,48.131 v1(40.721,48.131)
FB_AD11: SIG_TEST1.14 U1.E13 U5.A9 | length 34.1
  Top Layer w0.089: U5.A9@31.856,51.008 35.479,54.631 37.948,54.631 38.03,54.631 38.03,54.25 38.246,54.25 38.246,54.631 38.246,54.954 38.462,54.954 38.462,54.631 38.462,54.25 38.678,54.25 38.678,54.631 38.678,54.954 38.894,54.954 38.894,54.631 38.894,54.25 39.11,54.25 39.11,54.631 39.11,54.954 39.326,54.954 39.326,54.631 39.326,54.25 39.541,54.25 39.541,54.631 39.541,54.954 39.757,54.954 39.757,54.631 39.757,54.25 39.973,54.25 39.973,54.631 39.973,54.954 40.189,54.954 40.189,54.631 40.189,54.25 40.405,54.25 40.405,54.631 40.405,54.954 40.621,54.954 40.621,54.631 40.621,54.25 40.837,54.25 40.837,54.631 40.945,54.631 SIG_TEST1.14@42.721,54.631 47.347,54.631 50.641,51.337 U1.E13@51.201,51.337 ; U5.A9@31.856,51.125 ccw(c31.856,51.406) 32.055,51.207 ccw(c32.254,51.008) U5.A9@31.973,51.008 ; U5.A9@31.856,51.214 ccw(c31.856,51.71) 32.207,51.359 ccw(c32.558,51.008) U5.A9@32.062,51.008 ; SIG_TEST1.14@42.147,54.557 ccw(c41.967,54.377) 41.967,54.631 ccw(c41.967,54.886) SIG_TEST1.14@42.147,54.706 ; SIG_TEST1.14@43.296,54.557 cw(c43.476,54.377) 43.476,54.631 cw(c43.476,54.886) SIG_TEST1.14@43.296,54.706 ; U1.E13@51.074,51.21 ccw(c50.766,50.902) 50.766,51.337 ccw(c50.766,51.773) U1.E13@51.074,51.465
FB_AD12: SIG_TEST1.34 U1.C11 U5.A12 | length 33.5
  Top Layer w0.089: U5.A12@33.977,48.887 34.161,48.703 ; U5.A12@34.025,48.687 cw(c34.077,48.466) 34.238,48.627 ; U5.A12@34.177,48.839 ccw(c34.398,48.787) 34.238,48.627 ; SIG_TEST1.34@42.147,44.557 ccw(c41.967,44.377) 41.967,44.631 ccw(c41.967,44.886) SIG_TEST1.34@42.147,44.706 ; SIG_TEST1.34@43.296,44.557 cw(c43.476,44.377) 43.476,44.631 cw(c43.476,44.886) SIG_TEST1.34@43.296,44.706 ; U1.C11@51.074,48.381 ccw(c50.766,48.073) 50.766,48.509 ccw(c50.766,48.945) U1.C11@51.074,48.637 ; U1.C11@51.201,48.509 50.389,48.509 46.512,44.631 SIG_TEST1.34@42.721,44.631 38.233,44.631 37.567,45.298 37.444,45.421 37.623,45.6 37.471,45.753 37.291,45.573 37.111,45.394 36.959,45.546 37.138,45.726 37.318,45.906 37.165,46.058 36.986,45.879 36.806,45.699 36.653,45.852 36.833,46.031 37.013,46.211 36.86,46.364 36.68,46.184 36.501,46.004 36.348,46.157 36.528,46.337 36.707,46.516 36.555,46.669 36.375,46.489 36.195,46.31 36.043,46.462 36.222,46.642 36.402,46.822 36.249,46.974 36.07,46.795 35.89,46.615 35.737,46.768 35.917,46.947 36.097,47.127 35.944,47.28 35.764,47.1 35.585,46.92 35.432,47.073 35.612,47.253 35.791,47.432 35.639,47.585 35.459,47.405 35.279,47.226 35.127,47.378 35.306,47.558 35.486,47.737 35.333,47.89 35.154,47.711 34.974,47.531 34.821,47.684 35.001,47.863 35.181,48.043 35.028,48.195 34.848,48.016 34.669,47.836 34.516,47.989 34.696,48.169 34.875,48.348 34.723,48.501 34.543,48.321 34.363,48.142 34.211,48.294 34.39,48.474 34.57,48.653 34.417,48.806 34.238,48.627 ; 34.161,48.703 ccw(c34.118,48.659) 34.085,48.712 cw(c34.118,48.659) 34.161,48.703 ; 34.161,48.703 cw(c34.205,48.747) 34.152,48.779 ccw(c34.205,48.747) 34.161,48.703 ; 34.161,48.703 34.238,48.627
FB_AD13: SIG_TEST1.35 U1.B11 U5.B11 | length 34.4
  Top Layer w0.089: U5.B11@32.563,48.887 33.273,48.887 38.029,44.131 38.329,44.131 38.36,44.131 38.36,44.454 38.576,44.454 38.576,44.131 38.576,43.809 38.792,43.809 38.792,44.131 38.792,44.454 39.008,44.454 39.008,44.131 39.008,43.809 39.224,43.809 39.224,44.131 39.224,44.454 39.44,44.454 39.44,44.131 39.44,43.809 39.656,43.809 39.656,44.131 39.656,44.454 39.872,44.454 39.872,44.131 39.872,43.809 40.088,43.809 40.088,44.131 40.088,44.454 40.303,44.454 40.303,44.131 40.303,43.809 40.519,43.809 40.519,44.131 40.519,44.454 40.735,44.454 40.735,44.131 40.735,43.809 40.951,43.809 40.951,44.131 40.951,44.454 41.167,44.454 41.167,44.131 41.167,43.809 41.383,43.809 41.383,44.131 41.383,44.454 41.599,44.454 41.599,44.131 41.599,43.809 41.815,43.809 41.815,44.131 41.923,44.131 SIG_TEST1.35@42.721,44.131 46.263,44.131 49.934,47.802 U1.B11@50.494,47.802 ; U5.B11@32.646,48.804 cw(c32.845,48.605) 32.845,48.887 cw(c32.845,49.168) U5.B11@32.646,48.969 ; U5.B11@32.709,48.741 cw(c33.059,48.391) 33.059,48.887 cw(c33.059,49.383) U5.B11@32.709,49.032 ; SIG_TEST1.35@42.147,44.057 ccw(c41.967,43.877) 41.967,44.131 ccw(c41.967,44.386) SIG_TEST1.35@42.147,44.206 ; SIG_TEST1.35@43.296,44.057 cw(c43.476,43.877) 43.476,44.131 cw(c43.476,44.386) SIG_TEST1.35@43.296,44.206 ; U1.B11@50.367,47.674 ccw(c50.058,47.366) 50.058,47.802 ccw(c50.058,48.238) U1.B11@50.367,47.93
FB_AD14: SIG_TEST1.36 U1.D10 U5.B12 | length 33.3
  Top Layer w0.089: U5.B12@33.27,48.18 33.439,48.011 33.515,47.935 ; U5.B12@33.328,47.982 cw(c33.381,47.801) 33.515,47.935 ; U5.B12@33.468,48.122 ccw(c33.649,48.069) 33.515,47.935 ; SIG_TEST1.36@42.147,43.557 ccw(c41.967,43.377) 41.967,43.631 ccw(c41.967,43.886) SIG_TEST1.36@42.147,43.706 ; SIG_TEST1.36@43.296,43.557 cw(c43.476,43.377) 43.476,43.631 cw(c43.476,43.886) SIG_TEST1.36@43.296,43.706 ; U1.D10@52.488,48.381 ccw(c52.18,48.073) 52.18,48.509 ccw(c52.18,48.945) U1.D10@52.488,48.637 ; U1.D10@52.616,48.509 51.804,48.509 46.926,43.631 SIG_TEST1.36@42.721,43.631 37.819,43.631 36.07,45.38 35.958,45.492 35.778,45.312 35.626,45.465 35.805,45.645 35.985,45.824 35.832,45.977 35.653,45.797 35.473,45.618 35.32,45.77 35.5,45.95 35.68,46.13 35.527,46.282 35.347,46.103 35.168,45.923 35.015,46.076 35.195,46.255 35.374,46.435 35.222,46.588 35.042,46.408 34.862,46.228 34.71,46.381 34.889,46.561 35.069,46.74 34.916,46.893 34.737,46.713 34.557,46.534 34.404,46.686 34.584,46.866 34.764,47.046 34.611,47.198 34.431,47.019 34.252,46.839 34.099,46.992 34.279,47.171 34.458,47.351 34.306,47.504 34.126,47.324 33.946,47.144 33.794,47.297 33.973,47.477 34.153,47.656 34,47.809 33.821,47.629 33.641,47.45 33.488,47.602 33.668,47.782 33.848,47.962 33.695,48.114 33.515,47.935
FB_AD15: SIG_TEST1.40 U1.B9 U5.D12 | length 33.9
  Top Layer w0.089: U5.D12@31.856,46.56 cw(c31.856,46.064) 32.207,46.415 cw(c32.558,46.765) U5.D12@32.062,46.765 ; U5.D12@31.856,46.649 cw(c31.856,46.367) 32.055,46.566 cw(c32.254,46.765) U5.D12@31.973,46.765 ; U5.D12@31.856,46.765 36.99,41.631 38.71,41.631 38.856,41.631 38.856,41.885 39.072,41.885 39.072,41.631 39.072,41.377 39.287,41.377 39.287,41.631 39.287,41.885 39.503,41.885 39.503,41.631 39.503,41.377 39.719,41.377 39.719,41.631 39.719,41.885 39.935,41.885 39.935,41.631 39.935,41.377 40.151,41.377 40.151,41.631 40.151,41.885 40.367,41.885 40.367,41.631 40.367,41.377 40.583,41.377 40.583,41.631 40.583,41.885 40.799,41.885 40.799,41.631 40.799,41.377 41.015,41.377 41.015,41.631 41.015,41.885 41.231,41.885 41.231,41.631 41.231,41.377 41.446,41.377 41.446,41.631 41.446,41.885 41.662,41.885 41.662,41.631 41.662,41.377 41.878,41.377 41.878,41.631 41.986,41.631 ; SIG_TEST1.40@42.142,41.561 ccw(c41.986,41.422) 41.986,41.631 ; SIG_TEST1.40@42.142,41.702 cw(c41.986,41.841) 41.986,41.631 ; SIG_TEST1.40@43.296,41.557 cw(c43.476,41.377) 43.476,41.631 cw(c43.476,41.886) SIG_TEST1.40@43.296,41.706 ; U1.B9@51.781,46.26 ccw(c51.473,45.952) 51.473,46.388 ccw(c51.473,46.824) U1.B9@51.781,46.515 ; U1.B9@51.909,46.388 51.348,46.388 46.592,41.631 SIG_TEST1.40@42.721,41.631 41.986,41.631
FB_AD16: SIG_TEST1.30 U1.A13 U5.E9 | length 34.1
  Top Layer w0.089: U5.E9@29.028,48.18 v1(29.735,48.18) ; U5.E9@29.11,48.097 cw(c29.309,47.898) 29.309,48.18 cw(c29.309,48.461) U5.E9@29.11,48.262 ; U5.E9@29.173,48.034 cw(c29.524,47.683) 29.524,48.18 cw(c29.524,48.676) U5.E9@29.173,48.325 ; v1(41.221,46.631) SIG_TEST1.30@42.721,46.631 46.495,46.631 U1.A13@48.373,48.509 ; SIG_TEST1.30@42.147,46.557 ccw(c41.967,46.377) 41.967,46.631 ccw(c41.967,46.886) SIG_TEST1.30@42.147,46.706 ; SIG_TEST1.30@43.296,46.557 cw(c43.476,46.377) 43.476,46.631 cw(c43.476,46.886) SIG_TEST1.30@43.296,46.706 ; U1.A13@48.192,48.509 cw(c47.757,48.509) 48.065,48.201 cw(c48.373,47.893) U1.A13@48.373,48.329
  Bottom Layer w0.089: v1(29.735,48.18) 30.356,48.18 31.904,46.631 35.852,46.631 35.884,46.631 35.884,46.377 36.1,46.377 36.1,46.631 36.1,46.885 36.316,46.885 36.316,46.631 36.316,46.377 36.532,46.377 36.532,46.631 36.532,46.885 36.747,46.885 36.747,46.631 36.747,46.377 36.963,46.377 36.963,46.631 36.963,46.885 37.179,46.885 37.179,46.631 37.179,46.377 37.395,46.377 37.395,46.631 37.395,46.885 37.611,46.885 37.611,46.631 37.611,46.377 37.827,46.377 37.827,46.631 37.827,46.885 38.043,46.885 38.043,46.631 38.043,46.377 38.259,46.377 38.259,46.631 38.259,46.885 38.475,46.885 38.475,46.631 38.475,46.377 38.691,46.377 38.691,46.631 38.691,46.885 38.906,46.885 38.906,46.631 38.906,46.377 39.122,46.377 39.122,46.631 39.122,46.885 39.338,46.885 39.338,46.631 39.338,46.377 39.554,46.377 39.554,46.631 39.554,46.885 39.77,46.885 39.77,46.631 39.77,46.377 39.986,46.377 39.986,46.631 39.986,46.885 40.202,46.885 40.202,46.631 40.202,46.387 40.418,46.387 40.418,46.631 40.526,46.631 v1(41.221,46.631)
FB_AD17: SIG_TEST1.31 U1.C12 U5.E10 | length 34.3
  Top Layer w0.089: U5.E10@29.735,47.473 v1(30.442,47.473) ; U5.E10@29.817,47.39 cw(c30.016,47.191) 30.016,47.473 cw(c30.016,47.754) U5.E10@29.817,47.555 ; U5.E10@29.88,47.327 cw(c30.231,46.976) 30.231,47.473 cw(c30.231,47.969) U5.E10@29.88,47.618 ; v1(40.721,46.131) SIG_TEST1.31@42.721,46.131 46.598,46.131 49.682,49.216 U1.C12@50.494,49.216 ; SIG_TEST1.31@42.147,46.057 ccw(c41.967,45.877) 41.967,46.131 ccw(c41.967,46.386) SIG_TEST1.31@42.147,46.206 ; SIG_TEST1.31@43.296,46.057 cw(c43.476,45.877) 43.476,46.131 cw(c43.476,46.386) SIG_TEST1.31@43.296,46.206 ; U1.C12@50.367,49.089 ccw(c50.058,48.78) 50.058,49.216 ccw(c50.058,49.652) U1.C12@50.367,49.344
  Bottom Layer w0.089: v1(30.442,47.473) 31.783,46.131 31.891,46.131 32.107,46.131 32.107,45.809 32.323,45.809 32.323,46.131 32.323,46.454 32.539,46.454 32.539,46.131 32.539,45.809 32.755,45.809 32.755,46.131 32.755,46.454 32.97,46.454 32.97,46.131 32.97,45.809 33.186,45.809 33.186,46.131 33.186,46.454 33.402,46.454 33.402,46.131 33.402,45.809 33.618,45.809 33.618,46.131 33.618,46.454 33.834,46.454 33.834,46.131 33.834,45.809 34.05,45.809 34.05,46.131 34.05,46.454 34.266,46.454 34.266,46.131 34.266,45.809 34.482,45.809 34.482,46.131 34.482,46.454 34.698,46.454 34.698,46.131 34.698,45.809 34.914,45.809 34.914,46.131 34.914,46.454 35.129,46.454 35.129,46.131 35.141,46.131 v1(40.721,46.131)
FB_AD18: SIG_TEST1.41 U1.A9 U5.E11 | length 34.3
  Top Layer w0.089: U5.E11@30.442,46.765 31.153,46.765 32.283,45.635 32.36,45.558 32.539,45.738 32.692,45.585 32.512,45.406 32.333,45.226 32.485,45.074 32.665,45.253 32.845,45.433 32.997,45.28 32.818,45.1 32.638,44.921 32.791,44.768 32.97,44.948 33.15,45.127 33.303,44.975 33.123,44.795 32.943,44.616 33.096,44.463 33.276,44.642 33.455,44.822 33.608,44.669 33.428,44.49 33.249,44.31 33.401,44.158 33.581,44.337 33.761,44.517 33.913,44.364 33.734,44.184 33.554,44.005 33.707,43.852 33.886,44.032 34.066,44.211 34.219,44.059 34.039,43.879 33.859,43.7 34.012,43.547 34.192,43.726 34.371,43.906 34.524,43.753 34.344,43.574 34.381,43.537 36.787,41.131 SIG_TEST1.41@42.721,41.131 ; U5.E11@30.524,46.683 cw(c30.724,46.484) 30.724,46.765 cw(c30.724,47.047) U5.E11@30.524,46.848 ; U5.E11@30.587,46.62 cw(c30.938,46.269) 30.938,46.765 cw(c30.938,47.262) U5.E11@30.587,46.911 ; SIG_TEST1.41@42.147,41.057 ccw(c41.967,40.877) 41.967,41.131 ccw(c41.967,41.386) SIG_TEST1.41@42.147,41.206 ; SIG_TEST1.41@42.721,41.135 46.656,41.135 U1.A9@51.201,45.681 ; SIG_TEST1.41@43.296,41.057 cw(c43.485,40.867) 43.485,41.135 ; SIG_TEST1.41@43.296,41.206 ccw(c43.467,41.377) 43.467,41.135 ; U1.A9@51.021,45.681 cw(c50.585,45.681) 50.893,45.372 cw(c51.201,45.064) U1.A9@51.201,45.5
FB_AD19: SIG_TEST1.42 U1.D9 U5.E12 | length 34.1
  Top Layer w0.089: U5.E12@31.149,45.853 cw(c31.149,45.357) 31.5,45.707 cw(c31.851,46.058) U5.E12@31.355,46.058 ; U5.E12@31.149,45.942 cw(c31.149,45.66) 31.348,45.859 cw(c31.547,46.058) U5.E12@31.266,46.058 ; U5.E12@31.149,46.058 36.576,40.631 39.713,40.631 39.859,40.631 39.859,40.428 40.075,40.428 40.075,40.631 40.075,40.835 40.291,40.835 40.291,40.631 40.291,40.428 40.507,40.428 40.507,40.631 40.507,40.835 40.723,40.835 40.723,40.631 40.723,40.428 40.938,40.428 40.938,40.631 40.938,40.835 41.154,40.835 41.154,40.631 41.154,40.428 41.37,40.428 41.37,40.631 41.37,40.835 41.586,40.835 41.586,40.631 41.586,40.428 41.802,40.428 41.802,40.631 41.91,40.631 SIG_TEST1.42@42.721,40.631 46.713,40.631 53.323,47.241 U1.D9@53.323,47.802 ; SIG_TEST1.42@42.147,40.557 ccw(c41.967,40.377) 41.967,40.631 ccw(c41.967,40.886) SIG_TEST1.42@42.147,40.706 ; SIG_TEST1.42@43.296,40.557 cw(c43.476,40.377) 43.476,40.631 cw(c43.476,40.886) SIG_TEST1.42@43.296,40.706 ; U1.D9@53.195,47.674 cw(c52.887,47.366) 53.323,47.366 cw(c53.759,47.366) U1.D9@53.45,47.674
FB_AD20: SIG_TEST1.32 U1.B12 U5.F9 | length 34.3
  Top Layer w0.089: U5.F9@28.321,47.473 v1(29.028,47.473) ; U5.F9@28.403,47.39 cw(c28.602,47.191) 28.602,47.473 cw(c28.602,47.754) U5.F9@28.403,47.555 ; U5.F9@28.466,47.327 cw(c28.817,46.976) 28.817,47.473 cw(c28.817,47.969) U5.F9@28.466,47.618 ; v1(41.221,45.631) SIG_TEST1.32@42.721,45.631 46.349,45.631 49.227,48.509 U1.B12@49.787,48.509 ; SIG_TEST1.32@42.147,45.557 ccw(c41.967,45.377) 41.967,45.631 ccw(c41.967,45.886) SIG_TEST1.32@42.147,45.706 ; SIG_TEST1.32@43.296,45.557 cw(c43.476,45.377) 43.476,45.631 cw(c43.476,45.886) SIG_TEST1.32@43.296,45.706 ; U1.B12@49.66,48.381 ccw(c49.351,48.073) 49.351,48.509 ccw(c49.351,48.945) U1.B12@49.66,48.637
  Bottom Layer w0.089: v1(29.028,47.473) 29.649,47.473 31.49,45.631 35.958,45.631 36.036,45.631 36.036,45.835 36.252,45.835 36.252,45.631 36.252,45.428 36.468,45.428 36.468,45.631 36.468,45.835 36.684,45.835 36.684,45.631 36.684,45.428 36.9,45.428 36.9,45.631 36.9,45.835 37.116,45.835 37.116,45.631 37.116,45.428 37.332,45.428 37.332,45.631 37.332,45.835 37.548,45.835 37.548,45.631 37.548,45.428 37.763,45.428 37.763,45.631 37.763,45.835 37.979,45.835 37.979,45.631 37.979,45.428 38.195,45.428 38.195,45.631 38.195,45.835 38.411,45.835 38.411,45.631 38.411,45.428 38.627,45.428 38.627,45.631 38.627,45.835 38.843,45.835 38.843,45.631 38.843,45.428 39.059,45.428 39.059,45.631 39.059,45.835 39.275,45.835 39.275,45.631 39.275,45.428 39.491,45.428 39.491,45.631 39.491,45.835 39.707,45.835 39.707,45.631 39.707,45.428 39.922,45.428 39.922,45.631 39.922,45.835 40.138,45.835 40.138,45.631 40.138,45.428 40.354,45.428 40.354,45.631 40.462,45.631 v1(41.221,45.631)
FB_AD21: SIG_TEST1.33 U1.A12 U5.F10 | length 34.2
  Top Layer w0.089: U5.F10@29.028,46.765 v1(29.735,46.765) ; U5.F10@29.11,46.683 cw(c29.309,46.484) 29.309,46.765 cw(c29.309,47.047) U5.F10@29.11,46.848 ; U5.F10@29.173,46.62 cw(c29.524,46.269) 29.524,46.765 cw(c29.524,47.262) U5.F10@29.173,46.911 ; v1(40.721,45.131) SIG_TEST1.33@42.721,45.131 46.41,45.131 U1.A12@49.08,47.802 ; SIG_TEST1.33@42.147,45.057 ccw(c41.967,44.877) 41.967,45.131 ccw(c41.967,45.386) SIG_TEST1.33@42.147,45.206 ; SIG_TEST1.33@43.296,45.057 cw(c43.476,44.877) 43.476,45.131 cw(c43.476,45.386) SIG_TEST1.33@43.296,45.206 ; U1.A12@48.9,47.802 cw(c48.464,47.802) 48.772,47.494 cw(c49.08,47.186) U1.A12@49.08,47.621
  Bottom Layer w0.089: v1(29.735,46.765) 31.369,45.131 31.477,45.131 31.693,45.131 31.693,44.877 31.909,44.877 31.909,45.131 31.909,45.385 32.124,45.385 32.124,45.131 32.124,44.877 32.34,44.877 32.34,45.131 32.34,45.385 32.556,45.385 32.556,45.131 32.556,44.877 32.772,44.877 32.772,45.131 32.772,45.385 32.988,45.385 32.988,45.131 32.988,44.877 33.204,44.877 33.204,45.131 33.204,45.385 33.42,45.385 33.42,45.131 33.42,44.877 33.636,44.877 33.636,45.131 33.636,45.385 33.852,45.385 33.852,45.131 33.852,44.877 34.068,44.877 34.068,45.131 34.068,45.385 34.283,45.385 34.283,45.131 34.283,44.877 34.499,44.877 34.499,45.131 34.499,45.385 34.715,45.385 34.715,45.131 34.715,44.877 34.931,44.877 34.931,45.131 34.931,45.385 35.147,45.385 35.147,45.131 35.147,44.877 35.363,44.877 35.363,45.131 35.363,45.385 35.579,45.385 35.579,45.131 35.579,44.877 35.795,44.877 35.795,45.131 35.941,45.131 v1(40.721,45.131)
FB_AD22: SIG_TEST1.43 U1.C8 U5.F11 | length 34.4
  Top Layer w0.089: U5.F11@29.735,46.058 30.425,46.058 36.352,40.131 36.46,40.131 36.675,40.131 36.675,39.877 36.891,39.877 36.891,40.131 36.891,40.385 37.107,40.385 37.107,40.131 37.107,39.877 37.323,39.877 37.323,40.131 37.323,40.385 37.539,40.385 37.539,40.131 37.539,39.877 37.755,39.877 37.755,40.131 37.755,40.385 37.971,40.385 37.971,40.131 38.151,40.131 SIG_TEST1.43@42.721,40.131 46.464,40.131 52.721,46.388 U1.C8@53.323,46.388 ; U5.F11@29.817,45.976 cw(c30.016,45.777) 30.016,46.058 cw(c30.016,46.34) U5.F11@29.817,46.141 ; U5.F11@29.88,45.913 cw(c30.231,45.562) 30.231,46.058 cw(c30.231,46.555) U5.F11@29.88,46.204 ; SIG_TEST1.43@42.147,40.057 ccw(c41.967,39.877) 41.967,40.131 ccw(c41.967,40.386) SIG_TEST1.43@42.147,40.206 ; SIG_TEST1.43@43.296,40.057 cw(c43.476,39.877) 43.476,40.131 cw(c43.476,40.386) SIG_TEST1.43@43.296,40.206 ; U1.C8@53.195,46.26 ccw(c52.887,45.952) 52.887,46.388 ccw(c52.887,46.824) U1.C8@53.195,46.515
FB_AD23: SIG_TEST1.44 U1.A8 U5.F12 | length 34
  Top Layer w0.089: U5.F12@30.442,45.146 cw(c30.442,44.649) 30.793,45 cw(c31.144,45.351) U5.F12@30.647,45.351 ; U5.F12@30.442,45.235 cw(c30.442,44.953) 30.641,45.152 cw(c30.84,45.351) U5.F12@30.559,45.351 ; U5.F12@30.442,45.351 36.162,39.631 38.748,39.631 38.932,39.631 38.932,39.428 39.148,39.428 39.148,39.631 39.148,39.835 39.364,39.835 39.364,39.631 39.364,39.428 39.58,39.428 39.58,39.631 39.58,39.835 39.795,39.835 39.795,39.631 39.795,39.428 40.011,39.428 40.011,39.631 40.011,39.835 40.227,39.835 40.227,39.631 40.227,39.428 40.443,39.428 40.443,39.631 40.443,39.835 40.659,39.835 40.659,39.631 40.659,39.428 40.875,39.428 40.875,39.631 40.875,39.835 41.091,39.835 41.091,39.631 41.091,39.428 41.307,39.428 41.307,39.631 41.307,39.835 41.523,39.835 41.523,39.631 41.523,39.428 41.739,39.428 41.739,39.631 41.846,39.631 SIG_TEST1.44@42.721,39.631 46.567,39.631 U1.A8@51.909,44.974 ; SIG_TEST1.44@42.147,39.557 ccw(c41.967,39.377) 41.967,39.631 ccw(c41.967,39.886) SIG_TEST1.44@42.147,39.706 ; SIG_TEST1.44@43.296,39.557 cw(c43.476,39.377) 43.476,39.631 cw(c43.476,39.886) SIG_TEST1.44@43.296,39.706 ; U1.A8@51.728,44.974 cw(c51.292,44.974) 51.6,44.665 cw(c51.909,44.357) U1.A8@51.909,44.793
FB_AD24: SIG_TEST1.8 U1.G16 U5.B6 | length 34.4
  Top Layer w0.089: U5.B6@28.882,52.568 ccw(c28.531,52.919) 29.028,52.919 ccw(c29.524,52.919) U5.B6@29.173,52.568 ; U5.B6@28.945,52.505 ccw(c28.746,52.704) 29.028,52.704 ccw(c29.309,52.704) U5.B6@29.11,52.505 ; U5.B6@29.028,52.422 29.028,53.15 33.509,57.631 33.617,57.631 33.833,57.631 33.833,57.428 34.049,57.428 34.049,57.631 34.049,57.835 34.264,57.835 34.264,57.631 34.264,57.428 34.48,57.428 34.48,57.631 34.48,57.835 34.696,57.835 34.696,57.631 34.696,57.428 34.912,57.428 34.912,57.631 34.912,57.835 35.128,57.835 35.128,57.631 35.128,57.428 35.344,57.428 35.344,57.631 35.344,57.835 35.56,57.835 35.56,57.631 35.56,57.428 35.776,57.428 35.776,57.631 35.776,57.835 35.992,57.835 35.992,57.631 35.992,57.428 36.208,57.428 36.208,57.631 36.208,57.835 36.423,57.835 36.423,57.631 36.423,57.428 36.639,57.428 36.639,57.631 36.639,57.835 36.855,57.835 36.855,57.631 36.855,57.428 37.071,57.428 37.071,57.631 37.071,57.835 37.287,57.835 37.287,57.631 37.325,57.631 SIG_TEST1.8@42.721,57.631 47.736,57.631 U1.G16@50.494,54.873 ; SIG_TEST1.8@42.147,57.557 ccw(c41.967,57.377) 41.967,57.631 ccw(c41.967,57.886) SIG_TEST1.8@42.147,57.706 ; SIG_TEST1.8@43.296,57.557 cw(c43.476,57.377) 43.476,57.631 cw(c43.476,57.886) SIG_TEST1.8@43.296,57.706 ; U1.G16@50.314,54.873 ccw(c49.878,54.873) 50.186,55.181 ccw(c50.494,55.489) U1.G16@50.494,55.054
FB_AD25: SIG_TEST1.19 U1.C16 U5.C6 | length 35
  Top Layer w0.089: U5.C6@28.321,51.715 v1(29.028,51.715) ; U5.C6@28.403,51.633 cw(c28.602,51.434) 28.602,51.715 cw(c28.602,51.997) U5.C6@28.403,51.798 ; U5.C6@28.466,51.57 cw(c28.817,51.219) 28.817,51.715 cw(c28.817,52.211) U5.C6@28.466,51.861 ; v1(41.221,52.131) SIG_TEST1.19@42.721,52.131 U1.C16@47.666,52.131 ; SIG_TEST1.19@42.147,52.057 ccw(c41.967,51.877) 41.967,52.131 ccw(c41.967,52.386) SIG_TEST1.19@42.147,52.206 ; SIG_TEST1.19@43.296,52.057 cw(c43.476,51.877) 43.476,52.131 cw(c43.476,52.386) SIG_TEST1.19@43.296,52.206 ; 47.02,52.131 cw(c47.02,51.399) U1.C16@47.538,51.917 ; 47.235,52.131 cw(c47.235,51.614) U1.C16@47.601,51.98 ; 47.44,52.131 ccw(c47.44,52.271) U1.C16@47.538,52.172 ; 47.45,52.131 cw(c47.45,51.828) U1.C16@47.664,52.043
  Bottom Layer w0.089: v1(29.028,51.715) 29.444,52.131 35.217,52.131 35.236,52.131 35.236,52.385 35.452,52.385 35.452,52.131 35.452,51.877 35.668,51.877 35.668,52.131 35.668,52.385 35.884,52.385 35.884,52.131 35.884,51.877 36.1,51.877 36.1,52.131 36.1,52.385 36.316,52.385 36.316,52.131 36.316,51.877 36.532,51.877 36.532,52.131 36.532,52.385 36.747,52.385 36.747,52.131 36.747,51.877 36.963,51.877 36.963,52.131 36.963,52.385 37.179,52.385 37.179,52.131 37.179,51.877 37.395,51.877 37.395,52.131 37.395,52.385 37.611,52.385 37.611,52.131 37.611,51.877 37.827,51.877 37.827,52.131 37.827,52.385 38.043,52.385 38.043,52.131 38.043,51.877 38.259,51.877 38.259,52.131 38.259,52.385 38.475,52.385 38.475,52.131 38.475,51.877 38.691,51.877 38.691,52.131 38.691,52.385 38.906,52.385 38.906,52.131 38.906,51.877 39.122,51.877 39.122,52.131 39.122,52.385 39.338,52.385 39.338,52.131 39.338,51.877 39.554,51.877 39.554,52.131 39.554,52.385 39.77,52.385 39.77,52.131 39.77,51.877 39.986,51.877 39.986,52.131 39.986,52.385 40.202,52.385 40.202,52.131 40.202,51.887 40.418,51.887 40.418,52.131 40.526,52.131 v1(41.221,52.131)
FB_AD26: SIG_TEST1.20 U1.B16 U5.D6 | length 34.1
  Top Layer w0.089: U5.D6@27.613,51.008 v1(28.321,51.008) ; U5.D6@27.696,50.926 cw(c27.895,50.727) 27.895,51.008 cw(c27.895,51.29) U5.D6@27.696,51.091 ; U5.D6@27.759,50.863 cw(c28.11,50.512) 28.11,51.008 cw(c28.11,51.504) U5.D6@27.759,51.153 ; v1(40.721,51.631) SIG_TEST1.20@42.721,51.631 46.665,51.631 ; SIG_TEST1.20@42.147,51.557 ccw(c41.967,51.377) 41.967,51.631 ccw(c41.967,51.886) SIG_TEST1.20@42.147,51.706 ; SIG_TEST1.20@43.296,51.557 cw(c43.476,51.377) 43.476,51.631 cw(c43.476,51.886) SIG_TEST1.20@43.296,51.706 ; U1.B16@46.778,51.344 ccw(c46.39,51.357) 46.665,51.631 ; U1.B16@46.953,51.518 cw(c46.939,51.906) 46.665,51.631 ; U1.B16@46.959,51.337 46.665,51.631
  Bottom Layer w0.089: v1(28.321,51.008) 29.019,51.008 29.642,51.631 29.75,51.631 29.966,51.631 29.966,51.377 30.182,51.377 30.182,51.631 30.182,51.885 30.398,51.885 30.398,51.631 30.398,51.377 30.614,51.377 30.614,51.631 30.614,51.885 30.83,51.885 30.83,51.631 30.83,51.377 31.046,51.377 31.046,51.631 31.046,51.885 31.262,51.885 31.262,51.631 31.262,51.377 31.478,51.377 31.478,51.631 31.478,51.885 31.693,51.885 31.693,51.631 31.693,51.377 31.909,51.377 31.909,51.631 31.909,51.885 32.125,51.885 32.125,51.631 32.125,51.377 32.341,51.377 32.341,51.631 32.341,51.885 32.557,51.885 32.557,51.631 32.557,51.377 32.773,51.377 32.773,51.631 32.773,51.885 32.989,51.885 32.989,51.631 32.989,51.377 33.205,51.377 33.205,51.631 33.205,51.885 33.421,51.885 33.421,51.631 33.421,51.377 33.637,51.377 33.637,51.631 33.637,51.885 33.852,51.885 33.852,51.631 33.852,51.377 34.068,51.377 34.068,51.631 34.068,51.885 34.284,51.885 34.284,51.631 34.284,51.377 34.5,51.377 34.5,51.631 34.5,51.885 34.716,51.885 34.716,51.631 34.716,51.377 34.932,51.377 34.932,51.631 35.027,51.631 v1(40.721,51.631)